# Altium PCB GatewayModbus.PcbDoc
Units mm, origin at the board's own origin, x right, y up, seen from the top; angles counter-clockwise.
Board outline 152.4 x 101.6 mm, 2 copper layers (Top Layer, Bottom Layer); 31 components, 26 nets, 112 pads, 36 vias.
Unrouted connection lines stored in the file: 21.
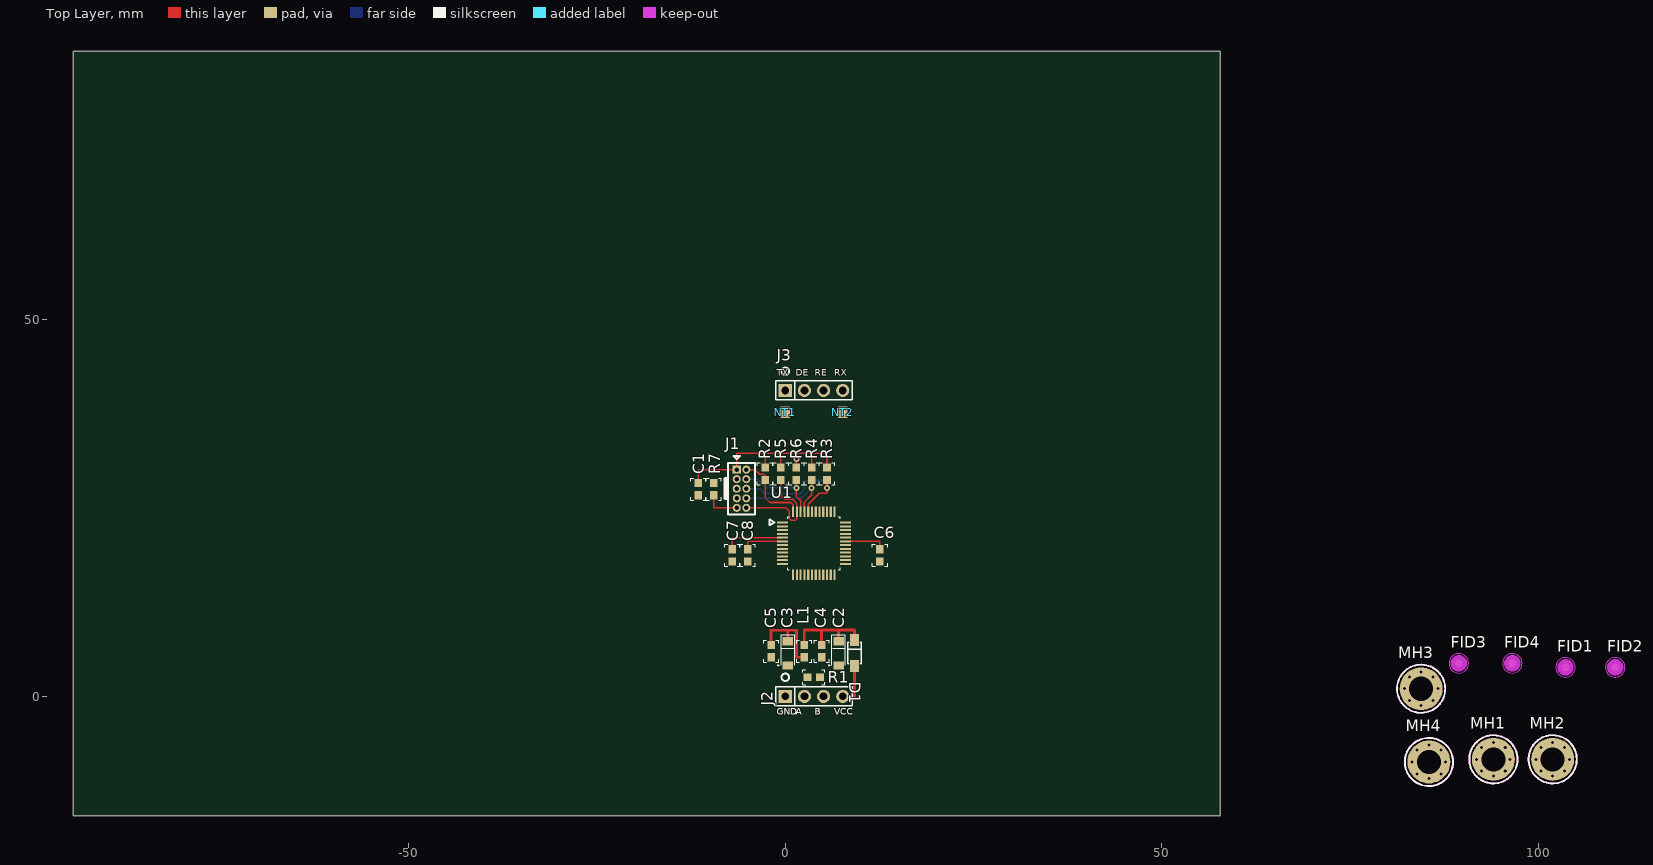
[diagram p0: Top Layer view]
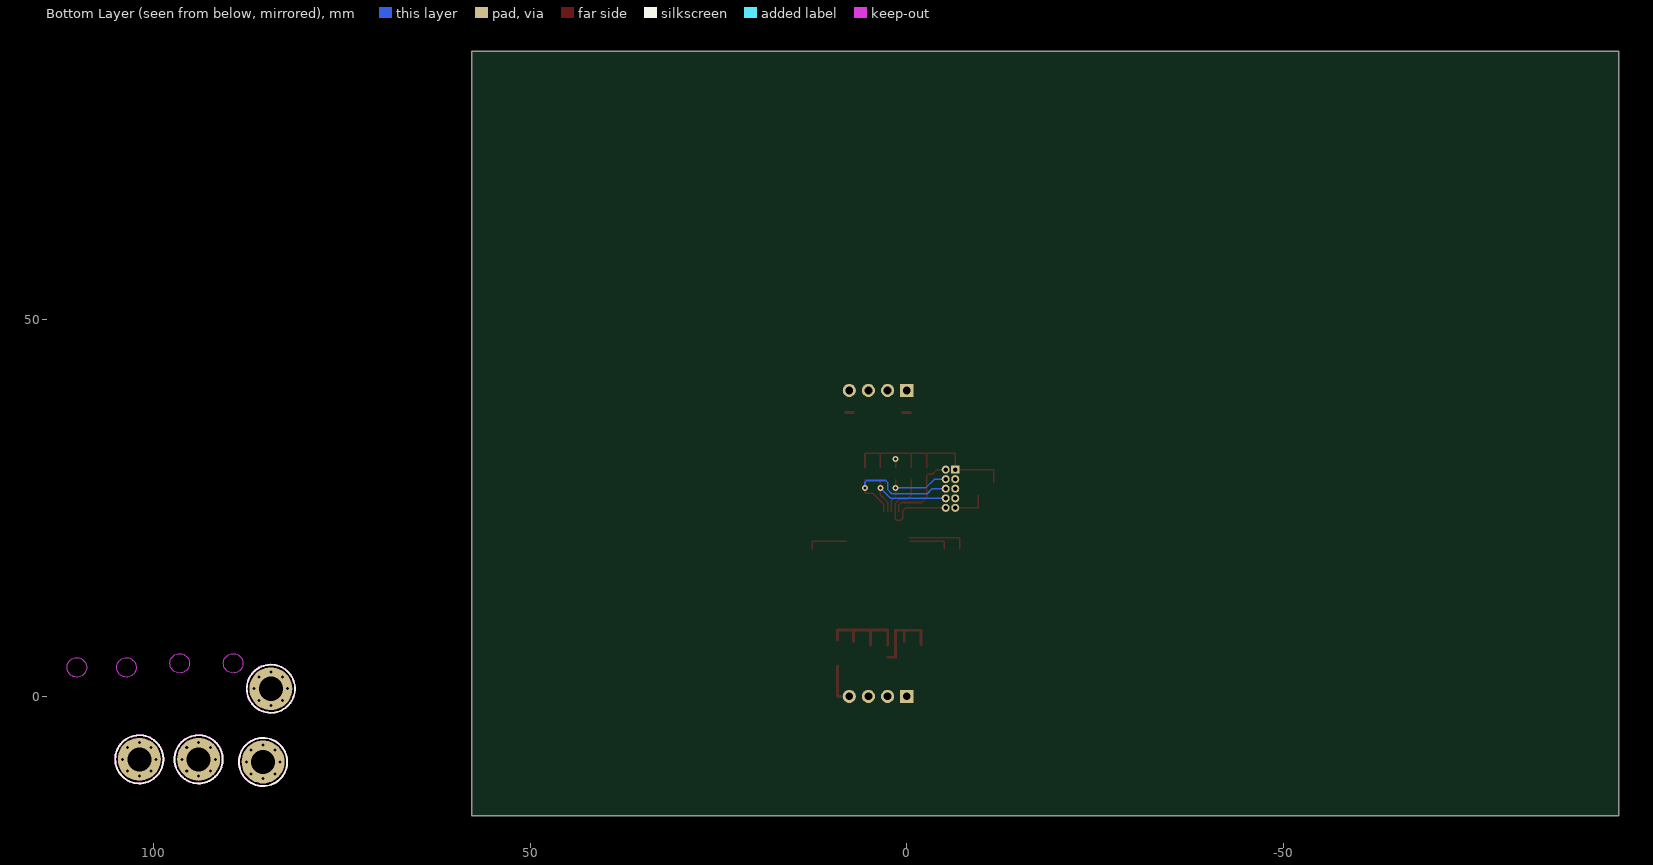
[diagram p1: Bottom Layer view, seen from below]

## Layer stack, top to bottom
Top Solder: solder mask 0.0102, Solder Resist, Dk 3.5
Top Layer: signal copper 0.0356
Dielectric 1: dielectric 0.32, FR-4, Dk 4.8
Bottom Layer: signal copper 0.0356
Bottom Solder: solder mask 0.0102, Solder Resist, Dk 3.5

## Board outline
-94.615,-15.875 57.785,-15.875 57.785,85.725 -94.615,85.725

## Design rules (kind name [scope] priority, off if disabled: settings)
Clearance [All] p1: gap=0.254 ignorepadtopadclearanceinfootprint=TRUE
PolygonConnect [All] p1: connectstyle=Relief reliefconductorwidth=0.254 reliefentries=4 polygonreliefangle="90 Angle" airgapwidth=0.254
RoutingVias [All] p1: holewidth=0.711 width=1.27 viastyle="Through Hole" minholewidth=0.711 minwidth=1.27 maxholewidth=0.711 maxwidth=1.27 useviatemplates=TRUE viatemplateguid#1={3A806ADE-E63A-4A2F-AADA-EE6A29EC5604} viatemplatename#1=v80h40m0mx0
SolderMaskExpansion [All] p1: expansion=0.102
Width [All] p1: maxlimit=0.381 minlimit=0.203 preferedwidth=0.254
30 further rules are at their usual default settings.

## Components (designator, comment, footprint, x,y, rotation, side; value= is the part's Value field where it differs from the comment)
C1 "100nF 16 X7R" CAPC0603 -11.557,27.534 r90 top
C2 "10uF/16V" "CAP POL TANT 1206" 7.087,5.715 r90 top
C3 "10uF/16V" "CAP POL TANT 1206" 0.33,5.715 r90 top
C4 "100nF 16 X7R" CAPC0603 4.826,6.015 r90 top
C5 "100nF 16 X7R" CAPC0603 -1.88,6.015 r90 top
C6 "100nF 16 X7R" CAPC0603 12.573,18.737 r90 top
C7 "100nF 16 X7R" CAPC0603 -7.036,18.737 r90 top
C8 "100nF 16 X7R" CAPC0603 -4.992,18.737 r90 top
D1 "1N4148" SOD123 9.195,5.765 r270 top
FID1 "Fiducial" Fiducial10-20 103.632,3.861 r90 top
FID2 "Fiducial" Fiducial10-20 110.236,3.861 r90 top
FID3 "Fiducial" Fiducial10-20 89.459,4.394 r90 top
FID4 "Fiducial" Fiducial10-20 96.571,4.394 r90 top
J1 "HEADER5x2-1.27mm" PAD10-2X05-HH -6.452,30.124 r270 top
J2 "PIN4" SIP4 3.81,0 r0 top locked
J3 "PIN4" SIP4 3.81,40.64 r0 top locked
L1 "Ferrite Bead 1K" INDC0603 2.515,6.015 r270 top
MH1 "M3 Mount Hole" M3_MOUNTING_HOLE 94.056,-8.357 r0 top
MH2 "M3 Mount Hole" M3_MOUNTING_HOLE 101.93,-8.357 r0 top
MH3 "M3 Mount Hole" M3_MOUNTING_HOLE 84.455,1.016 r0 top
MH4 "M3 Mount Hole" M3_MOUNTING_HOLE 85.496,-8.712 r0 top
NT1 "Net-Tie" Net-Tie_50milWide_30milLong 0,37.719 r90 top net-tie
NT2 "Net-Tie" Net-Tie_50milWide_30milLong 7.62,37.719 r90 top net-tie
R1 "120.0 - 5%" RESC0603 3.785,2.54 r0 top
R2 "10.0K - 5%" RESC0603 -2.692,29.577 r270 top
R3 "10.0K - 5%" RESC0603 5.537,29.577 r270 top
R4 "10.0K - 5%" RESC0603 3.505,29.577 r270 top
R5 "10.0K - 5%" RESC0603 -0.584,29.577 r270 top
R6 "10.0K - 5%" RESC0603 1.473,29.577 r270 top
R7 "10.0K - 5%" RESC0603 -9.5,27.534 r270 top
U1 "PS32K116LFF0MLCR" LQFP48-NXP 3.791,20.341 r0 top locked value=Value

## Footprints (in the part's own frame and the unit in brackets; to place one, negate y for a bottom-side part, rotate by r counter-clockwise, add the part's x,y. Pads: shape width x height; smd on the part's side, far side on the other; paste and mask are expansions set on the pad)
"CAP POL TANT 1206" [mm] "SMD Tantalum Capacitor 1206"
  rect 1.1x1.4 smd mask+0.076: 1(1.6,0) 2(-1.6,0)
  silkscreen extent -1.73,-0.9 2.5,1.4, body extent -1.73,-0.9 1.67,0.9, height 1.81
CAPC0603 [mm] "SMD Chip Ceramic Capacitor 0603"
  rect 1.1x1 smd mask+0.051: 1(-0.825,0) 2(0.825,0)
  silkscreen extent -1.45,-1.02 1.45,1.02, body extent -0.75,-0.4 0.75,0.4, height 0.55
Fiducial10-20 [mm]
  round 1 smd mask+0.5: 1(0,0)
  Top Layer keep-out circle w1.178: c0,0 r0.5
  Keep-Out Layer circle w0.1: c0,0 r1.296
INDC0603 [mm] "SMD Inductor Chip 0603"
  rect 1.1x1 smd mask+0.051: 1(-0.825,0) 2(0.825,0)
  silkscreen extent -1.45,-1.02 1.45,1.02, body extent -0.8,-0.4 0.8,0.4, height 0.95
LQFP48-NXP [mm]
  rrect25% 1.44x0.28 smd: 1(-4.185,2.75) 2(-4.185,2.25) 3(-4.185,1.75) 4(-4.185,1.25) 5(-4.185,0.75) 6(-4.185,0.25) 7(-4.185,-0.25) 8(-4.185,-0.75) 9(-4.185,-1.25) 10(-4.185,-1.75) 11(-4.185,-2.25) 12(-4.185,-2.75) 25(4.185,-2.75) 26(4.185,-2.25) 27(4.185,-1.75) 28(4.185,-1.25) 29(4.185,-0.75) 30(4.185,-0.25) 31(4.185,0.25) 32(4.185,0.75) 33(4.185,1.25) 34(4.185,1.75) 35(4.185,2.25) 36(4.185,2.75)
  rrect25% 0.28x1.44 smd: 13(-2.75,-4.185) 14(-2.25,-4.185) 15(-1.75,-4.185) 16(-1.25,-4.185) 17(-0.75,-4.185) 18(-0.25,-4.185) 19(0.25,-4.185) 20(0.75,-4.185) 21(1.25,-4.185) 22(1.75,-4.185) 23(2.25,-4.185) 24(2.75,-4.185) 37(2.75,4.185) 38(2.25,4.185) 39(1.75,4.185) 40(1.25,4.185) 41(0.75,4.185) 42(0.25,4.185) 43(-0.25,4.185) 44(-0.75,4.185) 45(-1.25,4.185) 46(-1.75,4.185) 47(-2.25,4.185) 48(-2.75,4.185)
  silkscreen extent -5.87,-3.5 3.5,3.5, body extent -4.5,-4.5 4.5,4.5, height 1.6
M3_MOUNTING_HOLE [mm]
  round 5.7 hole 3.2: 1(0,0)
  Top Layer keep-out region: 0,0
  Keep-Out Layer circle w0.254: c0,0 r3.2
  silkscreen extent -3.2,-3.2 3.2,3.2
Net-Tie_50milWide_30milLong [mil]
  rect 30x50 smd paste-20 mask-20: 1(-15,0) 2(15,0)
  Top Layer region: -6,25 6,25 6,-25 -6,-25
PAD10-2X05-HH [mil] "Header 2x5 paso 0.05\""
  rect 42x42 hole 24: 1(0,0)
  round 42 hole 24: 2(0,50) 3(50,0) 4(50,50) 5(100,0) 6(100,50) 7(150,0) 8(150,50) 9(200,0) 10(200,50)
  silkscreen extent -71,-60 235,95, body extent -25,-33 225,85, height 185
RESC0603 [mm] "SMD Chip Resistor 0603"
  rect 1.1x1 smd mask+0.051: 1(-0.825,0) 2(0.825,0)
  silkscreen extent -1.45,-1.02 1.45,1.02, body extent -0.8,-0.4 0.8,0.4, height 0.38
SIP4 [mm]
  rect 1.75x1.75 hole 1.016: 1(-3.81,0)
  round 1.75 hole 1.016: 2(-1.27,0) 3(1.27,0) 4(3.81,0)
  silkscreen extent -5.08,-1.27 5.08,3.04, body extent -5.08,-1.27 5.08,1.27, height 8.38
SOD123 [mil] "SOD-123; 2 Leads; Body 2.7 x 1.6 mm, (LxW)"
  rect 63x48 smd: A(66.93,0) K(-66.93,0)
  silkscreen extent -57,-35 57,35, body extent -73,-33 73,30, height 50

## Part data
C1 C4 C5 C6 C7 C8: library part CAPC0603, "SMD Ceramic Chip Capacitor 0603"
C2 C3: library part "CAP POL TANT", "Polarized Capacitor Tantalium"
D1: "Small Signal Diode"
FID1 FID2 FID3 FID4: "Fiducial mark.  There is nothing to buy or mount.. No entry in BOM.", Manufacturer=N/A, ClassName=FiducialMark, CompType=Fiducial, LatestRevisionDate=2014-08-01, LatestRevisionNote="Added Alternate PartNumber and Alternate Manufacturer parameters to appropriate components.", MountType=N/A, PackageReference=Fiducial, PartNumber=N/A, Publisher="Texas Instruments", SymbolCreator=codlsc, SymbolVersion=2009-11-4
J1: "PAD10-2X05-HH"
L1: library part BLM18KG102SN1D, "BLM18KG102SN1D 1K"
MH1 MH2 MH3 MH4: "M3 Mounting Hole"
NT1 NT2: "Single point connection between nets.", LatestRevisionDate=2015-10-18, LatestRevisionNote="Added Alternate PartNumber and Alternate Manufacturer parameters to appropriate components.", MountType=SMT, PackageReference=N/A, Publisher="Texas Instruments", SymbolCreator=codlsc, SymbolVersion=2009-07-01
R1 R2 R3 R4 R5 R6 R7: library part "RESC 0603", "SMD Chip Resistor 0603"
U1: "Microcontroladores ARM - MCU S32K116, M0+, Flash 128K, RAM 17KB", Manufacturer_Part_Number=ps32k116lff0mlcr, Built_By=EMA_Jessica, Copyright="Copyright (C) 2016 Accelerated Designs. All rights reserved", RefDes=RefDes, Type=Type, Vendor=NXP

## Via types
v1: diameter 0.8, hole 0.4, Top Layer to Bottom Layer, tented both sides, 36 vias

## Nets (pads, with @x,y where several pads share a name; then routed paths per layer and width w, separated by ;. In a path a pad name is that pad's centre, name@x,y a point inside that pad or via, vN(x,y) a via of type N, cw(c..) or ccw(c..) an arc to the next point about the centre after c; other vN are vias at no path point)
A: J2.2 R1.1
B: J2.3 R1.2
DE: J3.2
"FTM0 CH6 CTS": U1.42
"FTM0 CH7 RTS": U1.41
GND: C1.1 C2.2 C3.2 C4.1 C5.1 C6.1 C7.1 C8.1 J1.3 J1.5 J2.1 R6.1 R7.1 U1.7 U1.30 | length 1.4
  Top Layer w0.203: R6.1 v1(1.473,31.521)
  Bottom Layer w0.203: v1(1.473,31.521) v1@1.473,31.826
"GND SENSE": J1.9 R7.2 | length 4.7
  Top Layer w0.203: R7.2 -9.5,25.044 J1.9
"LPUART0 CTS": U1.38
"LPUART0 RTS": U1.37
"LPUART0 RX": U1.36
"LPUART0 TX": U1.35
"LPUART1 RX": U1.28
"LPUART1 TX": U1.27
LPUART1_RX: NT2.1
LPUART1_TX: NT1.1
R\E\S\E\T\: J1.10 R5.2 U1.47 | length 14.7
  Top Layer w0.203: J1.10 0.102,25.044 0.533,24.613 0.533,23.622 0.737,23.419 1.397,23.419 1.541,23.562 U1.47 1.541,25.598 0.926,26.213 -0.076,26.213 -0.584,26.721 R5.2
RE: J3.3
RX: J3.4 NT2.2
"SWD CLK": J1.4 R6.2 U1.46 | length 11.6
  Top Layer w0.203: R6.2 v1(1.473,27.686) 1.473,26.568 2.041,26.001 U1.46
  Bottom Layer w0.203: J1.4 -3.683,28.854 -2.515,27.686 v1(1.473,27.686)
"SWD DIO": J1.2 R2.2 U1.48 | length 10.8
  Top Layer w0.203: J1.2 -4.039,30.124 -3.41,29.496 -2.794,29.496 -2.692,29.395 R2.2 -2.692,26.416 -2.032,25.756 0.737,25.756 1.041,25.452 U1.48
SWO: J1.6 R3.2 U1.44 | length 18.9
  Top Layer w0.203: U1.44 3.045,24.531 3.045,25.514 4.506,26.975 5.436,26.975 5.537,27.076 v1(5.537,27.686) R3.2
  Bottom Layer w0.203: J1.6 -3.378,27.584 -2.724,26.93 1.988,26.93 2.54,27.483 2.54,28.423 2.794,28.677 5.283,28.677 5.537,28.423 v1(5.537,27.686)
TDI: J1.8 R4.2 U1.45 | length 13.9
  Top Layer w0.203: U1.45 2.541,25.807 3.505,26.772 v1(3.505,27.686) R4.2
  Bottom Layer w0.203: J1.8 2.134,26.314 v1(3.505,27.686)
TX: J3.1 NT1.2
VCC: D1.A J2.4 | length 5.6
  Top Layer w0.381: J2.4 9.195,0 D1.A@9.195,4.04
VDD: C1.2 C2.1 C4.2 C6.2 C7.2 D1.K J1.1 L1.1 R2.1 R3.1 R4.1 R5.1 U1.5 U1.31 | length 55.9
  Top Layer w0.203: C1.2 -11.557,30.124 J1.1 -6.452,32.283 -2.692,32.283 ; C7.2 -7.036,21.091 U1.5 ; R2.1 -2.692,32.283 ; R5.1 -0.584,32.283 ; R4.1 3.505,32.283 ; R3.1 5.537,32.283 3.505,32.283 ; U1.31 12.573,20.591 C6.2 ; -2.692,32.283 -0.584,32.283 ; -0.584,32.283 3.505,32.283
  Top Layer w0.381: L1.1 2.515,8.839 4.826,8.839 ; C4.2 4.826,8.839 ; C2.1 7.087,8.839 ; D1.K@9.195,7.49 9.195,8.839 7.087,8.839 ; 4.826,8.839 7.087,8.839
VDDA: C3.1 C5.2 C8.2 L1.2 U1.6 | length 17
  Top Layer w0.203: C8.2 -4.992,20.591 U1.6
  Top Layer w0.381: C5.2 -1.88,8.788 0.33,8.788 ; C3.1 0.33,8.788 ; L1.2 1.499,5.19 1.499,8.788 0.33,8.788
pads on no net: FID1.1 FID2.1 FID3.1 FID4.1 J1.7 MH1.1 MH2.1 MH3.1 MH4.1 U1.1 U1.2 U1.3 U1.4 U1.8 U1.9 U1.10 U1.11 U1.12 U1.13 U1.14 U1.15 U1.16 U1.17 U1.18 U1.19 U1.20 U1.21 U1.22 U1.23 U1.24 U1.25 U1.26 U1.29 U1.32 U1.33 U1.34 U1.39 U1.40 U1.43
copper on no net:
  other v1: 85.496,-10.937 94.056,-10.582 101.93,-10.582 83.923,-10.285 87.069,-10.285 92.483,-9.93 95.629,-9.93 100.357,-9.93 103.503,-9.93 83.271,-8.712 87.721,-8.712 91.831,-8.357 96.281,-8.357 99.705,-8.357 104.155,-8.357 83.923,-7.139 87.069,-7.139 92.483,-6.784 95.629,-6.784 100.357,-6.784 103.503,-6.784 85.496,-6.487 94.056,-6.132 101.93,-6.132 84.455,-1.209 82.882,-0.557 86.028,-0.557 82.23,1.016 86.68,1.016 82.882,2.589 86.028,2.589 84.455,3.241

## Silkscreen, mask and mechanical layers (free items; w line width, h text height)
Top Overlay:
  text "TX" at -1.143,42.24 h1.52
  text "DE" at 1.397,42.24 h1.52
  text "RE" at 3.937,42.24 h1.52
  text "RX" at 6.477,42.24 h1.52
  text "GND" at -1.143,-2.769 h1.52
  text "GND" at -1.143,-2.769 h1.52
  text "A" at 1.397,-2.769 h1.52
  text "A" at 1.397,-2.769 h1.52
  text "B" at 3.937,-2.769 h1.52
  text "B" at 3.937,-2.769 h1.52
  text "VCC" at 6.477,-2.769 h1.52
  text "VCC" at 6.477,-2.769 h1.52